# Altium PCB Master - OLD.PcbDoc (part 1 of 3)
Units mm, origin at the board's own origin, x right, y up, seen from the top; angles counter-clockwise.
Board outline 154.8 x 60 mm, 4 copper layers (Top Layer, GND-Layer, PWR-Layer, Bottom Layer), stack 1.57 mm thick; 131 components, 96 nets, 448 pads, 522 vias.
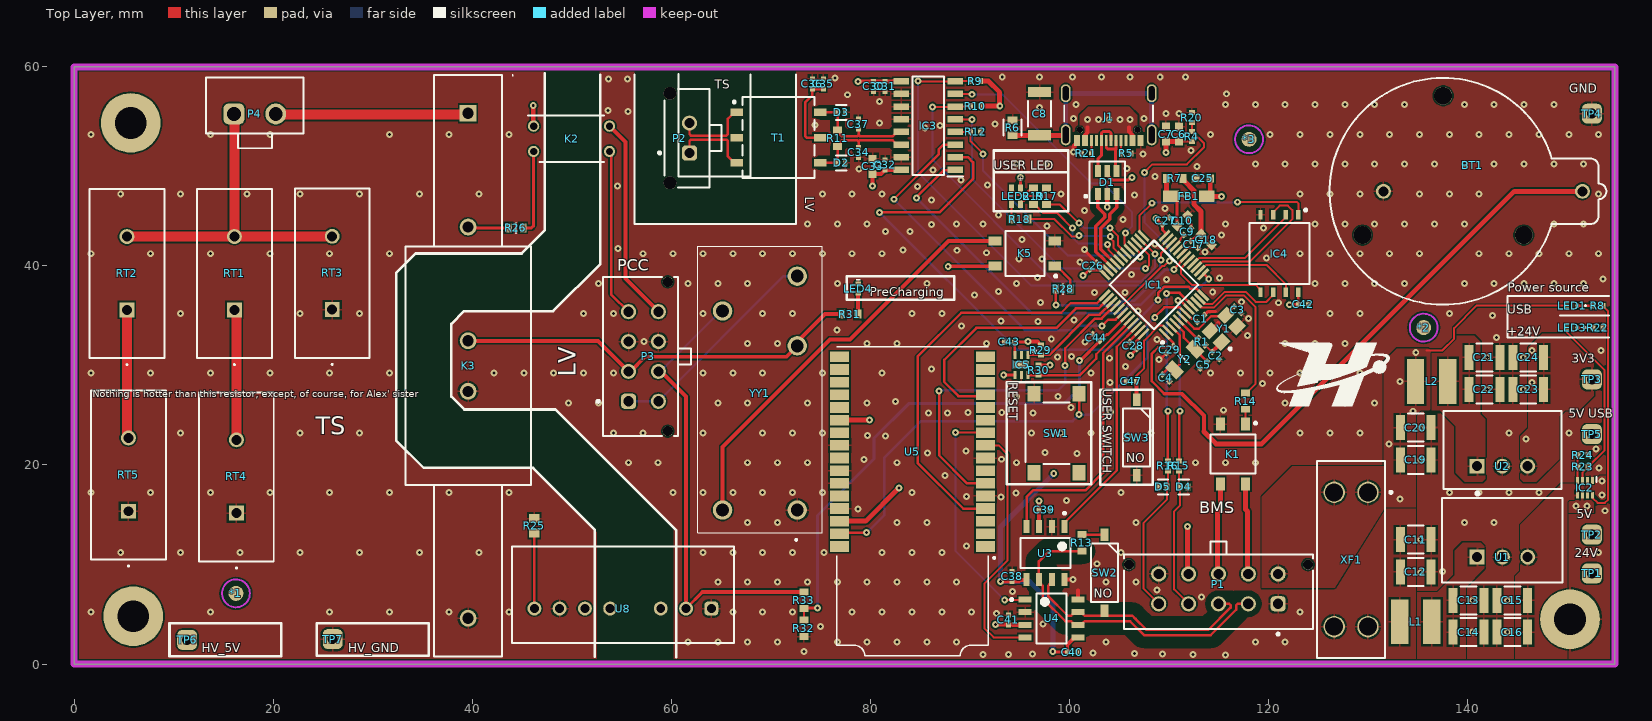
[diagram p0: Top Layer view]
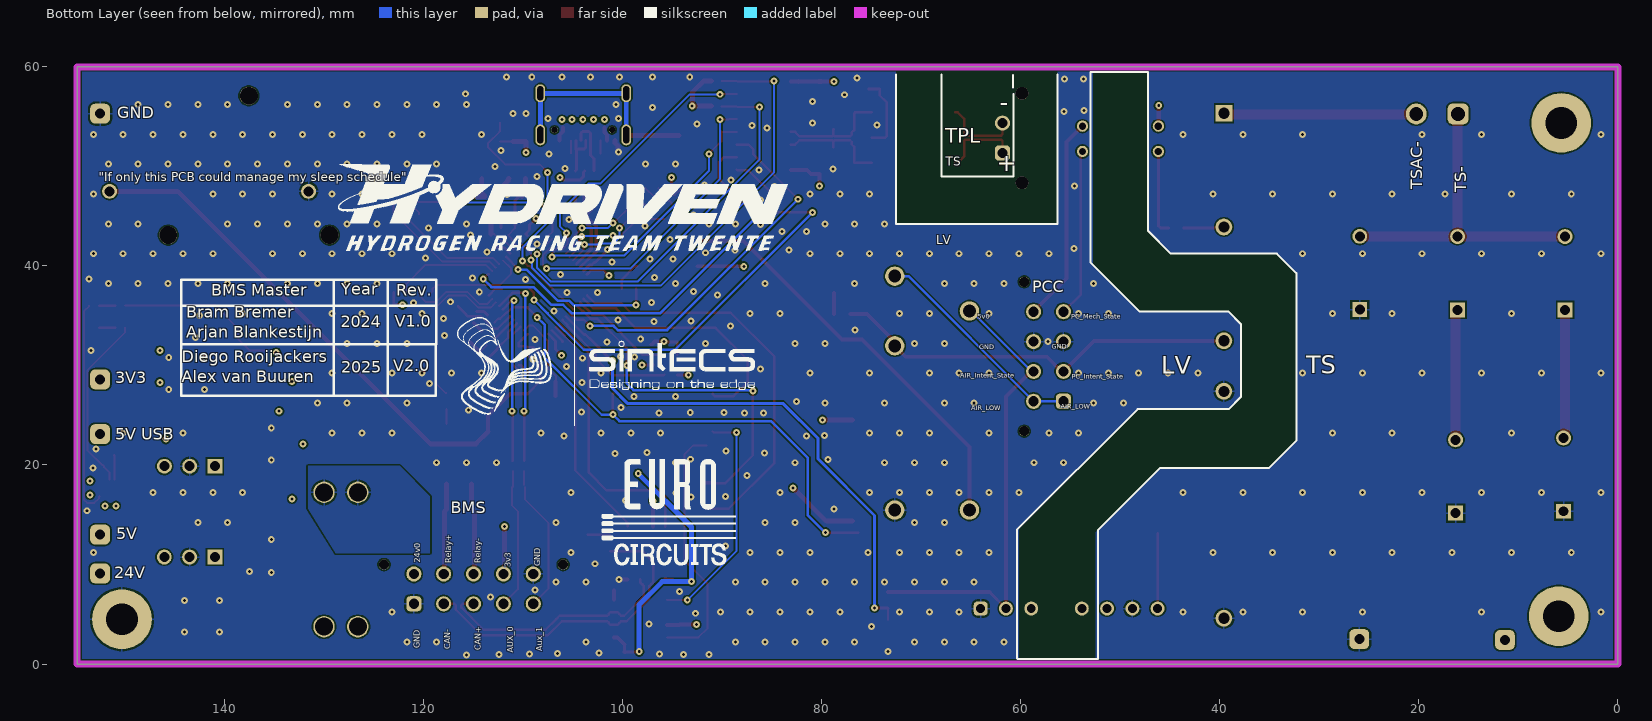
[diagram p1: Bottom Layer view, seen from below]
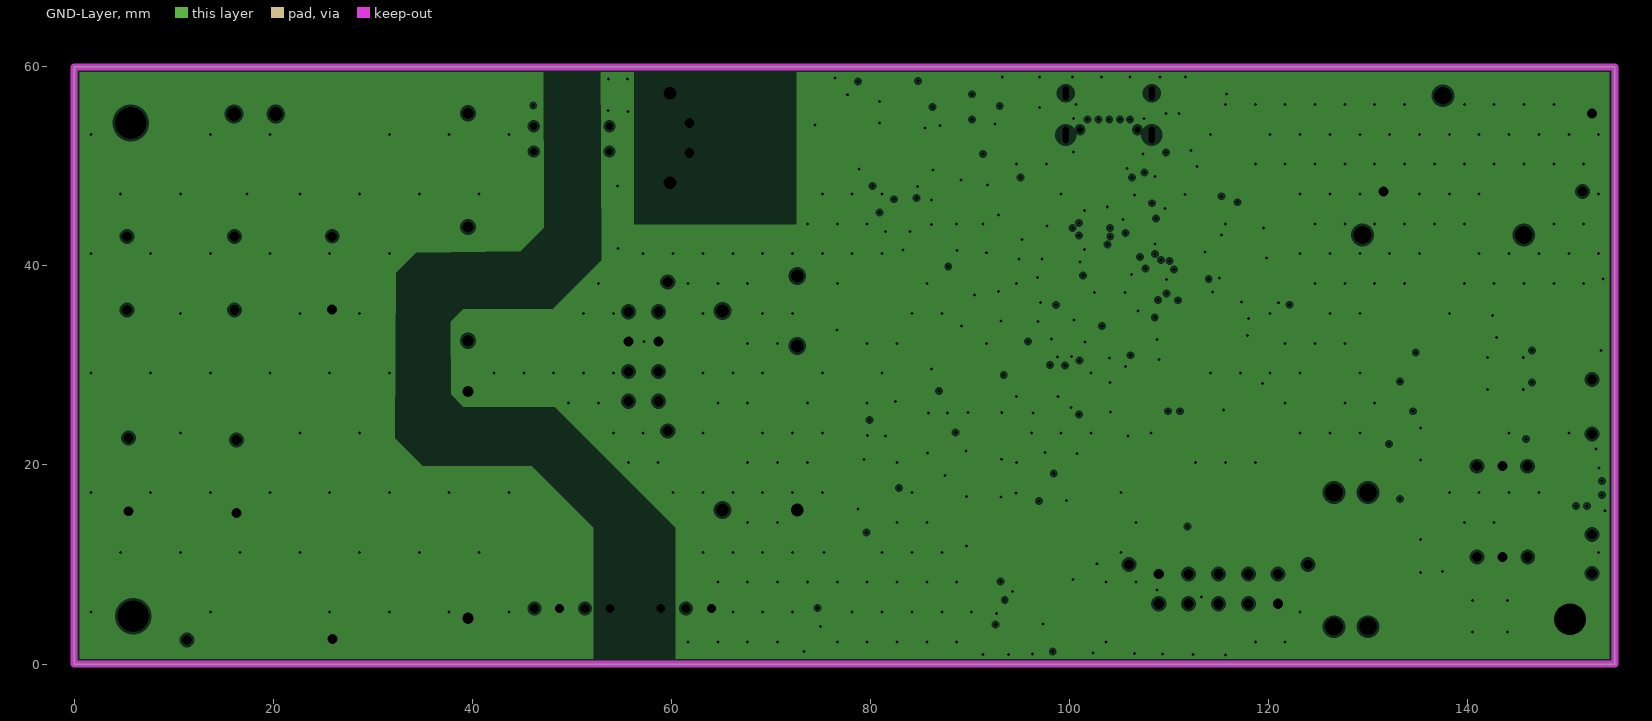
[diagram p2: GND-Layer, clearances drawn from the general rule]
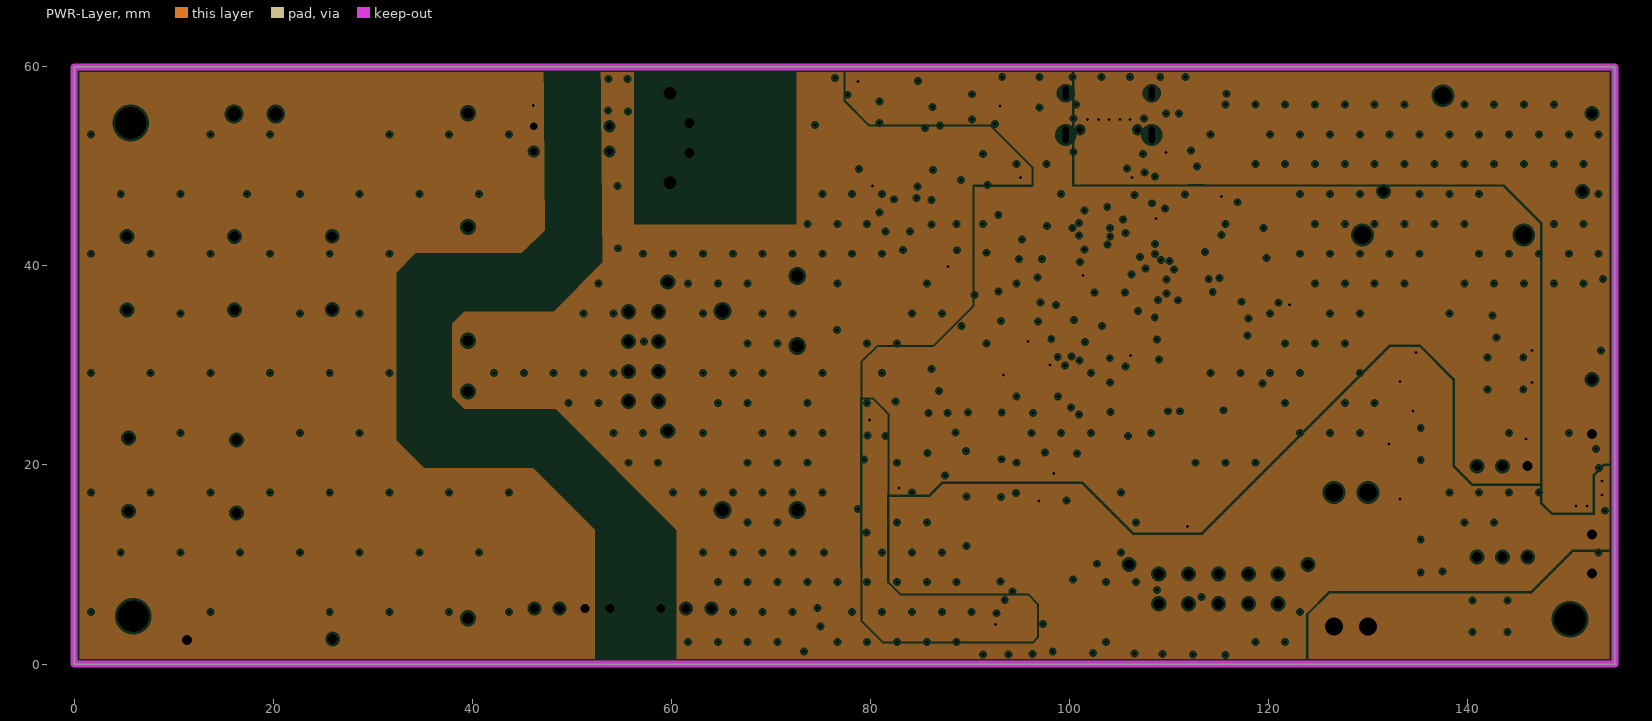
[diagram p3: PWR-Layer, clearances drawn from the general rule]
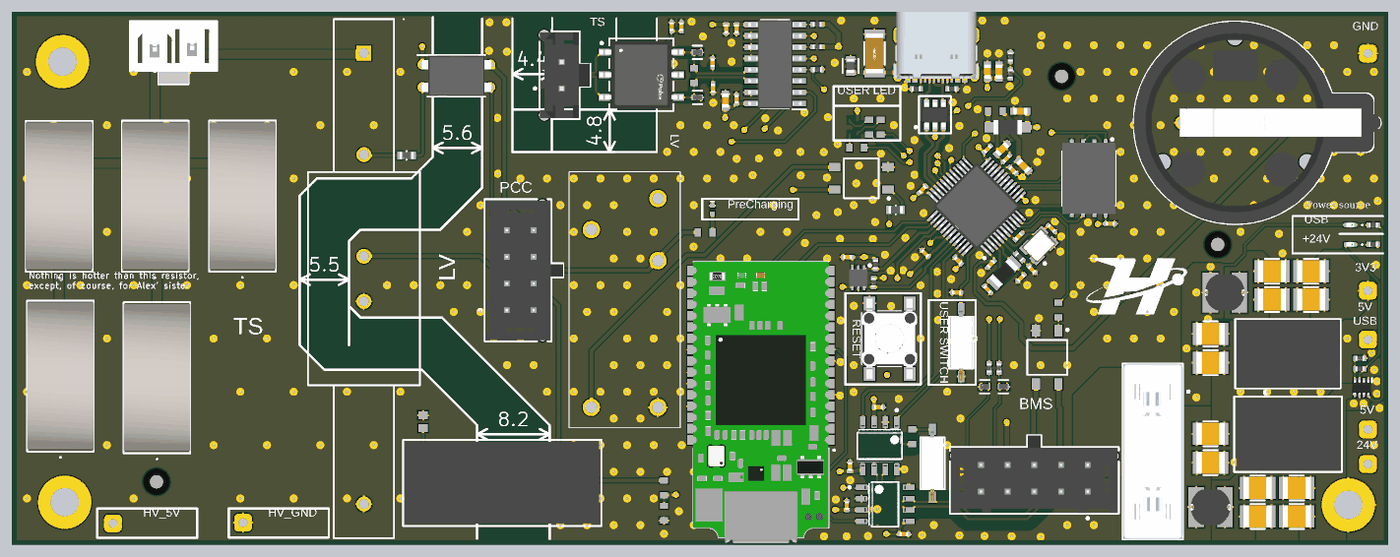
[diagram p5: 3D render of the assembled board from above, using the file's embedded part models]

## Layer stack, top to bottom
Top Solder: solder mask 0.0102, Solder Resist, Dk 3.5
Top Layer: signal copper 0.035
Dielectric1: prepreg 0.36, FR-4, Dk 4.8
GND-Layer: plane copper 0.035, net GND
Dielectric2: core 0.71, FR-4, Dk 4.8
PWR-Layer: plane copper 0.035, net (Multiple Nets)
Dielectric3: prepreg 0.36, FR-4, Dk 4.8
Bottom Layer: signal copper 0.035
Bottom Solder: solder mask 0.0102, Solder Resist, Dk 3.5

## Board outline
0,0 0,60 154.8,60 154.8,0

## Design rules (kind name [scope] priority, off if disabled: settings)
BoardOutlineClearance [All] p1: gap=0.25 ignorepadtopadclearanceinfootprint=FALSE except(0: Arc-SplitContinuation Track-SplitContinuation SMDPad-SplitContinuation THPad-SplitContinuation Via-SplitContinuation Fill-SplitContinuation Poly-SplitContinuation Region-SplitContinuation Text-SplitContinuation)
Clearance "Schematic Clearance Constraint_2" [InDifferentialPairClass('TPL100')] p1: gap=0.15 ignorepadtopadclearanceinfootprint=FALSE except(0.6: Arc-Fill Arc-Poly Arc-Region Track-Fill Track-Poly Track-Region Fill-Fill Fill-Poly Fill-Region Poly-Poly Poly-Region Region-Region)
Clearance "Schematic Clearance Constraint_1" [InDifferentialPairClass('USB90')] p2: gap=0.15 ignorepadtopadclearanceinfootprint=FALSE except(0.6: Arc-Fill Arc-Poly Arc-Region Track-Fill Track-Poly Track-Region Fill-Fill Fill-Poly Fill-Region Poly-Poly Poly-Region Region-Region)
Clearance "Schematic Clearance Constraint" [InDifferentialPairClass('CAN120')] p3: gap=0.15 ignorepadtopadclearanceinfootprint=FALSE except(1.2: Arc-Fill Arc-Poly Arc-Region Track-Fill Track-Poly Track-Region Fill-Fill Fill-Poly Fill-Region Poly-Poly Poly-Region Region-Region)
Clearance [All] p4: gap=0.15 ignorepadtopadclearanceinfootprint=TRUE
ComponentClearance ComponentClearance_netTie0.4 [HasFootprint('NETTIE_0.4mm')] p1: gap=0.15 collisioncheckmode=3 verticalgap=0.15 showdistances=FALSE
ComponentClearance ComponentClearance_netTie0.2 [HasFootprint('NETTIE_0.2mm')] p2: gap=0.15 collisioncheckmode=3 verticalgap=0.15 showdistances=FALSE
ComponentClearance ComponentClearance_0402 [HasFootprint('FP-RT0402-0_35-MFG')] p3: gap=0.15 collisioncheckmode=3 verticalgap=0.15 showdistances=FALSE
ComponentClearance ComponentClearance_0402cap [HasFootprint('WCAP-CSGP_0402_L1W0.5H0.5')] p4: gap=0.15 collisioncheckmode=3 verticalgap=0.15 showdistances=FALSE
ComponentClearance ComponentClearance_default [All] p5: gap=0.25 collisioncheckmode=3 verticalgap=0.25 showdistances=FALSE
DiffPairsRouting USB90 [InDifferentialPairClass('USB90')] p1: maxlimit=0.2 minlimit=0.15 mostfreqgap=0.15 toplayer_minwidth=0.3 toplayer_maxwidth=0.4 toplayer_prefwidth=0.341 bottomlayer_minwidth=0.3 bottomlayer_maxwidth=0.4 bottomlayer_prefwidth=0.341 impedanceprofiledriven=TRUE impedanceprofileid={451BF59F-1CB8-41AE-B4E6-E606ACC86787} impedanceprofilevalue=90.000000 maxuncoupledlength=12.7
DiffPairsRouting TPL100 [InDifferentialPairClass('TPL100')] p2: maxlimit=0.2 minlimit=0.15 mostfreqgap=0.15 toplayer_minwidth=0.2 toplayer_maxwidth=0.3 toplayer_prefwidth=0.247 bottomlayer_minwidth=0.2 bottomlayer_maxwidth=0.3 bottomlayer_prefwidth=0.247 impedanceprofiledriven=TRUE impedanceprofileid={6E5FC908-C1E6-4651-8C0E-0D922B76A3E9} impedanceprofilevalue=100.000000 maxuncoupledlength=12.7
DiffPairsRouting CAN120 [InDifferentialPairClass('CAN120')] p3: maxlimit=0.4 minlimit=0.2 mostfreqgap=0.3 toplayer_minwidth=0.2 toplayer_maxwidth=0.3 toplayer_prefwidth=0.248 bottomlayer_minwidth=0.2 bottomlayer_maxwidth=0.3 bottomlayer_prefwidth=0.248 impedanceprofiledriven=TRUE impedanceprofileid={1664124B-BFFD-4D7B-8FBB-B2DC7230501B} impedanceprofilevalue=120.000000 maxuncoupledlength=12.7
Height [All] p1: minheight=0 maxheight=999 prefheight=1
HoleSize HoleSize-PTH [All] p1: absolutevalues=TRUE maxlimit=8 minlimit=0.25 maxpercent=80.000 minpercent=20.000
HoleToHoleClearance [All] p1: gap=0.35 allowstackedmicrovias=TRUE
MatchedLengths DiffPair_USB90MatchedLengths [InDifferentialPairClass('USB90')] p1: tolerance=25.4 checknetsindiffpair=FALSE checkdiffpairvsdiffpair=TRUE checkxsignals=TRUE checkothers=TRUE
MatchedLengths DiffPair_TPL100MatchedLengths [InDifferentialPairClass('TPL100')] p2: tolerance=25.4 checknetsindiffpair=FALSE checkdiffpairvsdiffpair=TRUE checkxsignals=TRUE checkothers=TRUE
MatchedLengths DiffPair_CAN120MatchedLengths [InDifferentialPairClass('CAN120')] p3: tolerance=25.4 checknetsindiffpair=FALSE checkdiffpairvsdiffpair=TRUE checkxsignals=TRUE checkothers=TRUE
MinimumAnnularRing [All] p1: minimumring=0.125
MinimumSolderMaskSliver [All] p1: minsoldermaskwidth=0.08
PlaneClearance PlaneClearance-IPI [All] p1: clearance=0.25
PlaneConnect [All] p1: pad.planeconnectstyle=Relief pad.reliefexpansion=0.25 pad.reliefentries=4 pad.reliefconductorwidth=0.3 pad.reliefairgap=0.25 via.planeconnectstyle=Direct via.reliefexpansion=0.175 via.reliefentries=4 via.reliefconductorwidth=0.2 via.reliefairgap=0.25
PolygonConnect PolygonConnect-xTW [InNet('+12')] p1: thpad.connectstyle=Relief thpad.reliefconductorwidth=0.5 thpad.reliefentries=4 thpad.polygonreliefangle="90 Angle" thpad.airgapwidth=0.2 smdpad.connectstyle=Relief smdpad.reliefconductorwidth=0.5 smdpad.reliefentries=4 smdpad.polygonreliefangle="90 Angle" smdpad.airgapwidth=0.2 via.connectstyle=Direct via.reliefconductorwidth=0.2 via.reliefentries=4 via.polygonreliefangle="90 Angle" via.airgapwidth=0.2
PolygonConnect PolygonConnect-xTW_1 [All] p2: thpad.connectstyle=Relief thpad.reliefconductorwidth=0.2 thpad.reliefentries=4 thpad.polygonreliefangle="90 Angle" thpad.airgapwidth=0.2 smdpad.connectstyle=Relief smdpad.reliefconductorwidth=0.2 smdpad.reliefentries=4 smdpad.polygonreliefangle="90 Angle" smdpad.airgapwidth=0.2 via.connectstyle=Direct via.reliefconductorwidth=0.2 via.reliefentries=4 via.polygonreliefangle="90 Angle" via.airgapwidth=0.2
RoomDefinition HV [InComponentClass('HV')] p1: confinementstyle=ConfineIn formatcopy=TRUE lockcomponents=FALSE outline 0.25,29.427 0.25,49.027 11.05,49.027 11.05,49.031 12.775,49.031 12.775,59.4 32.848,59.4 32.848,59.527 46.302,59.527 46.302,55.65 55.002,55.65 55.002,12.3 66.75,12.3 66.75,1.65 46.302,1.65 46.302,0.353 32.848,0.353 32.848,9.006 11.25,9.006 11.25,9.194 0.4,9.194 0.4,29.427
RoomDefinition TPL_Trans [InComponentClass('TPL_Trans')] p2: confinementstyle=ConfineIn formatcopy=TRUE lockcomponents=FALSE outline 58.32,47.215 58.32,58.485 73.525,58.485 73.525,59.425 81.812,59.425 81.812,59.58 89.812,59.58 89.812,59.375 91.75,59.375 91.75,54.3 91.775,54.3 91.775,52.7 89.812,52.7 89.812,48.63 81.15,48.63 81.15,48.375 65.505,48.375 65.505,47.215
RoomDefinition CAN_Trans [InComponentClass('CAN_Trans')] p3: confinementstyle=ConfineIn formatcopy=TRUE lockcomponents=FALSE outline 93.225,3.3 93.225,5.55 93.6,5.55 93.6,9.925 94.495,9.925 94.495,15.65 96.325,15.65 96.325,16.15 98.575,16.15 98.575,15.65 100.695,15.65 100.695,14.095 105.37,14.095 105.37,4.255 102.05,4.255 102.05,1.475 101.425,1.475 101.425,0.475 99.175,0.475 99.175,1.475 93.7,1.475 93.7,3.3
RoutingCorners [All] p1: cornerstyle=45-Degree minsetback=2.5 maxsetback=2.5
RoutingVias [All] p1: holewidth=0.3 width=0.7 viastyle="Through Hole" minholewidth=0.3 minwidth=0.7 maxholewidth=0.3 maxwidth=0.7 viatemplateguid#1={BCADC7C4-F6CF-4C0F-8EE4-AB964700880C} viatemplatename#1=v70h30
SMDEntry [All] p1: side=TRUE corner=TRUE anyangle=FALSE
SMDNeckDown SMDNeckDown_1 [All] p1: percent=120.000
SMDToCorner [All] p1: distance=0
SilkToSilkClearance [All] p1: silktosilkclearance=0
SilkToSolderMaskClearance SilkscreenOverComponentPads [IsPad] p1: minsilkscreentomaskgap=0.1 clearancetoexposedcopper=TRUE
SolderMaskExpansion SolderMaskExpansion_Pad [InPadClass('All Pads')] p1: expansion=0.05 istentingtop=FALSE
SolderMaskExpansion SolderMaskExpansion_Via [IsVia] p2: expansion=0.075 istentingtop=FALSE soldermaskfromhole=TRUE
SolderMaskExpansion [All] p3: expansion=0.102 istentingtop=FALSE
SupplyNets "Schematic Supply Nets_12" [InNet('p5v0_USB')] p1: voltage=0.000
SupplyNets "Schematic Supply Nets_11" [InNet('GND')] p2: voltage=0.000
SupplyNets "Schematic Supply Nets_10" [InNet('pVin')] p3: voltage=0.000
SupplyNets "Schematic Supply Nets_9" [InNet('p3v3')] p4: voltage=0.000
SupplyNets "Schematic Supply Nets_8" [InNet('p5v0_ST')] p5: voltage=0.000
SupplyNets "Schematic Supply Nets_7" [InNet('p24v0')] p6: voltage=0.000
SupplyNets "Schematic Supply Nets_6" [InNet('p3v3A')] p7: voltage=0.000
SupplyNets "Schematic Supply Nets_5" [InNet('p5v0')] p8: voltage=0.000
SupplyNets "Schematic Supply Nets_4" [InNet('p5v0_PS')] p9: voltage=0.000
SupplyNets "Schematic Supply Nets_3" [InNet('GND_HV')] p10: voltage=0.000
SupplyNets "Schematic Supply Nets_2" [InNet('p3v3Ref')] p11: voltage=0.000
SupplyNets "Schematic Supply Nets" [InNet('pBat')] p12: voltage=0.000
UnRoutedNet [All] p1: checkbadconnections=TRUE
Width [All] p1: maxlimit=2 minlimit=0.2 preferedwidth=0.4
18 further rules are at their usual default settings.

## Classes and differential pairs
component class TPL_Trans: C30 C31 C32 C33 C34 C35 C36 C37 D2 D3 IC3 P2 R9 R10 R11 R12 T1
component class CAN_Trans: C38 C39 C40 C41 R13 SW2 U3 U4
component class HV: K2 K3 P4 R25 R26 RT1 RT2 RT3 RT4 RT5 U8
component class Designator: C44 K2 K3 K5 LED4 P3 P4 R25 R26 R28 R31 R32 R33 RT1 RT2 RT3 RT4 RT5 TP6 TP7 U8 YY1
component class Top: *1 *2 *3
differential pair class TPL100: RDTX TPL
component class Transceivers: C30 C31 C32 C33 C34 C35 C36 C37 C38 C39 C40 C41 D2 D3 IC3 R9 R10 R11 R12 R13 SW2 T1 U3 U4
component class STM32: C1 C2 C3 C4 C5 C6 C7 C8 D1 IC1 J1 R1 R4 R5 R6 R20 R21 SW1 Y1 Y2
component class Power: BT1 C9 C10 C11 C12 C13 C14 C15 C16 C17 C18 C19 C20 C21 C22 C23 C24 C25 C26 C27 C28 C29 FB1 IC2 L1 L2 LED1 LED3 R7 R8 R22 R23 R24 TP1 TP2 TP3 TP4 TP5 U1 U2 XF1
component class Peripherals: C42 C43 C47 D4 D5 IC4 IC5 K1 LED2 R14 R15 R16 R17 R18 R19 R29 R30 SW3
component class Connectors: P1 P2
differential pair class CAN120: CAN
component class STLink: U5
differential pair class USB90: USB
differential pair RDTX: +RDTX_P -RDTX_N
differential pair TPL: +TPL_P -TPL_N
differential pair CAN: +CAN_HI -CAN_LO
differential pair USB: +USB_P -USB_N

## Components (designator, comment, footprint, x,y, rotation, side; value= is the part's Value field where it differs from the comment)
*1 "GTT standard Fiducial 1.5" "Fiducial 1.5mm" 16.25,7.1 r0 top
*2 "GTT standard Fiducial 1.5" "Fiducial 1.5mm" 135.6,33.8 r0 top
*3 "GTT standard Fiducial 1.5" "Fiducial 1.5mm" 118.05,52.725 r0 top
BT1 "79528211" 79528211 137.55,47.5 r180 top locked
C1 "CAP 0402 100nF X7R" WCAP-CSGP_0402_L1W0.5H0.5 113.2,34.7 r225 top value=100nF
C2 "CAP 0402 16pF X7R" WCAP-CSGP_0402_L1W0.5H0.5 114.7,31 r135 top value=16pF
C3 "CAP 0402 16pF X7R" WCAP-CSGP_0402_L1W0.5H0.5 116.9,35.6 r135 top value=16pF
C4 "CAP 0402 5.1pF X7R" WCAP-CSGP_0402_L1W0.5H0.5 109.7,28.75 r135 top value=5.1pF
C5 "CAP 0402 5.1pF X7R" WCAP-CSGP_0402_L1W0.5H0.5 113.475,30.05 r45 top value=5.1pF
C6 "CAP 0603 2.2uF X7R" WCAP-CSGP_0603_L1.6W0.8H0.8_Reflow 111,53.25 r270 top value=2.2uF
C7 "CAP 0603 2.2uF X7R" WCAP-CSGP_0603_L1.6W0.8H0.8_Reflow 109.7,53.25 r270 top value=2.2uF
C8 "CC1808KKX7REBB102" FP-CC1808-0_4-2_2-MFG 97,55.3 r270 top
C9 "CAP 0402 100nF X7R" WCAP-CSGP_0402_L1W0.5H0.5 111.854,43.454 r225 top value=100nF
C10 "CAP 0603 1uF X7R" WCAP-CSGP_0603_L1.6W0.8H0.8_Reflow 111.354,44.554 r45 top value=1uF
C11 "885012209048" WCAP-CSGP_1210_L3.2W2.5H2.5 134.8,12.5 r180 top value=4.7µF
C12 "885012209048" WCAP-CSGP_1210_L3.2W2.5H2.5 134.8,9.25 r180 top value=4.7µF
C13 "885012209048" WCAP-CSGP_1210_L3.2W2.5H2.5 140.1,6.4 r180 top value=4.7µF
C14 "885012209048" WCAP-CSGP_1210_L3.2W2.5H2.5 140.1,3.2 r180 top value=4.7µF
C15 "885012109014" WCAP-CSGP_1210_L3.2W2.5H2.5 144.5,6.4 r0 top
C16 "885012109014" WCAP-CSGP_1210_L3.2W2.5H2.5 144.5,3.2 r0 top
C17 "CAP 0402 100nF X7R" WCAP-CSGP_0402_L1W0.5H0.5 112.554,42.154 r135 top value=100nF
C18 "CAP 0603 1uF X7R" WCAP-CSGP_0603_L1.6W0.8H0.8_Reflow 113.754,42.654 r315 top value=1uF
C19 "885012209048" WCAP-CSGP_1210_L3.2W2.5H2.5 134.8,20.5 r180 top value=4.7µF
C20 "885012209048" WCAP-CSGP_1210_L3.2W2.5H2.5 134.8,23.75 r180 top value=4.7µF
C21 "885012209048" WCAP-CSGP_1210_L3.2W2.5H2.5 141.7,30.8 r180 top value=4.7µF
C22 "885012209048" WCAP-CSGP_1210_L3.2W2.5H2.5 141.7,27.6 r180 top value=4.7µF
C23 "885012109014" WCAP-CSGP_1210_L3.2W2.5H2.5 146.1,27.6 r0 top
C24 "885012109014" WCAP-CSGP_1210_L3.2W2.5H2.5 146.1,30.8 r0 top
C25 "CAP 0603 4.7uF X7R" WCAP-CSGP_0603_L1.6W0.8H0.8_Reflow 113.4,48.8 r180 top value=4.7uF
C26 "CAP 0402 100nF X7R" WCAP-CSGP_0402_L1W0.5H0.5 102.4,40 r225 top value=100nF
C27 "CAP 0402 100nF X7R" WCAP-CSGP_0402_L1W0.5H0.5 109.7,44.525 r225 top value=100nF
C28 "CAP 0402 100nF X7R" WCAP-CSGP_0402_L1W0.5H0.5 106.4,32 r315 top value=100nF
C29 "CAP 0402 100nF X7R" WCAP-CSGP_0402_L1W0.5H0.5 110.1,31.6 r45 top value=100nF
C30 "CAP 0402 100nF X7R" WCAP-CSGP_0402_L1W0.5H0.5 80.325,58.05 r90 top value=100nF
C31 "CAP 0402 1nF X7R" WCAP-CSGP_0402_L1W0.5H0.5 81.475,58.05 r90 top value=1nF
C32 "CAP 0402 100nF X7R" WCAP-CSGP_0402_L1W0.5H0.5 81.475,50.15 r270 top value=100nF
C33 "CAP 0603 2.2uF X7R" WCAP-CSGP_0603_L1.6W0.8H0.8_Reflow 80.225,50 r270 top value=2.2uF
C34 "CAP 0402 68pF X7R" WCAP-CSGP_0402_L1W0.5H0.5 78.825,51.4 r270 top value=68pF
C35 "DNP" WCAP-CSGP_0402_L1W0.5H0.5 75.275,58.3 r270 top value=100pF
C36 "CAP 0402 100pF X7R" WCAP-CSGP_0402_L1W0.5H0.5 74.175,58.3 r270 top value=100pF
C37 "CAP 0402 68pF X7R" WCAP-CSGP_0402_L1W0.5H0.5 78.8,54.25 r270 top value=68pF
C38 "CAP 0402 100nF X7R" WCAP-CSGP_0402_L1W0.5H0.5 94.25,8.8 r270 top value=100nF
C39 "CAP 0402 100nF X7R" WCAP-CSGP_0402_L1W0.5H0.5 97.45,15.5 r180 top value=100nF
C40 "CAP 0402 100nF X7R" WCAP-CSGP_0402_L1W0.5H0.5 100.3,1.2 r180 top value=100nF
C41 "CAP 0402 100nF X7R" WCAP-CSGP_0402_L1W0.5H0.5 93.875,4.425 r270 top value=100nF
C42 "CAP 0402 100nF X7R" WCAP-CSGP_0402_L1W0.5H0.5 123.504,36.144 r180 top value=100nF
C43 "CAP 0402 100nF X7R" WCAP-CSGP_0402_L1W0.5H0.5 93.975,32.375 r0 top value=100nF
C44 "CAP 0402 5.1pF X7R" WCAP-CSGP_0402_L1W0.5H0.5 102.7,32.8 r315 top value=5.1pF
C47 "CAP 0402 100nF X7R" WCAP-CSGP_0402_L1W0.5H0.5 106.225,28.4 r0 top value=100nF
D1 "USBLC6-2SC6" ST_SOT23-6L 103.8,48.4 r90 top
D2 "PESD5V0F1BLD,315" FP-SOD882D-MFG 77.075,50.35 r0 top
D3 "PESD5V0F1BLD,315" FP-SOD882D-MFG 77.075,55.425 r180 top
D4 "PESD5V0F1BLD,315" FP-SOD882D-MFG 111.5,17.8 r180 top
D5 "PESD5V0F1BLD,315" FP-SOD882D-MFG 109.4,17.8 r0 top
FB1 "742792118" WE-CBF_1206_L3.2W1.6H1.1_HC 112,47 r180 top
IC1 "STM32G491CET6" QFP50P900X900X160-48N 108.5,38.1 r135 top
IC2 "TPS2116DRLR" SOTFL50P160X60-8N 151.8,17.7 r270 top
IC3 "MC33664ATL1EG" SOIC127P600X175-16N 85.812,54.105 r180 top
IC4 "AS5F38G04SND-08LIN" SON127P800X600X80-8N 121.104,41.244 r270 top
IC5 "2521020222501" SON65P200X200X55-7N-D 95.175,30.05 r270 top
J1 "629722000214" 629722000214 103.95,56.205 r180 top
K1 "AQY212S" PNSC-SOP4_V 116.43,21.1 r270 top
K2 "CPC1333G" DIP762W53P254L457H335Q4N 49.975,52.775 r0 top
K3 "67-1-C-24_5D" 671C245D 39.575,55.34 r270 top
K5 "AQY212S" PNSC-SOP4_V 95.525,41.25 r180 top
L1 "744773047" WE-PD2_4532 134.8,4.25 r0 top
L2 "744773047" WE-PD2_4532 136.4,28.4 r0 top
LED1 "150040GS73220" 150040GS73220 150.5,36 r180 top
LED2 "150066M153000" WL-SFCD_0606 -1175.35,1317 r90 top
LED3 "150040GS73220" 150040GS73220 150.5,33.8 r180 top
LED4 "QBLP595-R" QTB-QBLP595_V 78.775,37.725 r270 top
P1 "66201021122" 66201021122 114.975,7.25 r0 top
P2 "66200211122" 66200211122 61.57,52.85 r270 top
P3 "66200821122" 66200821122 56.9,30.9 r270 top
P4 "64900211122" 64900211122 18.15,56.125 r180 top
R1 "RES 0402 120R 1%" FP0402 113.3,32.4 r315 top value=120R
R4 "RES 0402 33kR 1%" FP0402 112.3,53 r90 top value=33kR
R5 "RES 0402 5.1kR 1%" FP0402 105.7,51.3 r180 top value=5.1kR
R6 "CRCW06031M00FKEA" FP-CRCW0603-e3-MFG 94.3,53.9 r270 top
R7 "RES 0603 47R 1%" RES_SM0603_YAGEORC_N 110.6,48.8 r180 top value=47R
R8 "RES 0402 1kR 1%" FP0402 153.1,36 r180 top value=1kR
R9 "RES 0402 5.1kR 1%" FP0402 90.55,58.575 r0 top value=5.1kR
R10 "RES 0402 5.1kR 1%" FP0402 90.55,56.05 r0 top value=5.1kR
R11 "RES 0603 150R 1%" RES_SM0603_YAGEORC_N 76.7,52.825 r270 top value=150R
R12 "RES 0402 5.1kR 1%" FP0402 90.575,53.5 r180 top value=5.1kR
R13 "RES 0603 120R 1%" RES_SM0603_YAGEORC_N 101.25,12.175 r90 top value=120R
R14 "RES 0603 330R 1%" RES_SM0603_YAGEORC_N 117.7,26.427 r270 top value=330R
R15 "RES 0402 1kR 1%" FP0402 111,19.9 r270 top value=1kR
R16 "RES 0402 1kR 1%" FP0402 109.9,19.9 r270 top value=1kR
R17 "RES 0603 330R 1%" RES_SM0603_YAGEORC_N 97.7,47 r90 top value=330R
R18 "RES 0603 330R 1%" RES_SM0603_YAGEORC_N 95,44.7 r180 top value=330R
R19 "RES 0603 330R 1%" RES_SM0603_YAGEORC_N 96.4,47 r90 top value=330R
R20 "RES 0402 82kR 1%" FP0402 112.3,54.9 r90 top value=82kR
R21 "RES 0402 5.1kR 1%" FP0402 101.7,51.3 r0 top value=5.1kR
R22 "RES 0402 1kR 1%" FP0402 153.1,33.8 r180 top value=1kR
R23 "RES 0402 100kR 1%" FP0402 151.6,19.8 r0 top value=100kR
R24 "RES 0402 27kR 1%" FP0402 151.6,21 r180 top value=27kR
R25 "26.7k" RESC1608X55X30ML15T15 46.225,13.875 r90 top
R26 "1kR" FP-ERA3A-MFG 44.375,43.825 r180 top
R28 "8.2kR" FP-ERA3A-MFG 99.375,37.7 r0 top value=330R
R29 "RES 0402 2.7kR 1%" FP0402 97.125,31.55 r90 top value=2.7kR
R30 "RES 0402 2.7kR 1%" FP0402 96.9,29.525 r90 top value=2.7kR
R31 "RES 0603 4.3kR 1%" RES_SM0603_YAGEORC_N 77.95,35.15 r180 top value=4.3kR
R32 "2.7kR" RES_SM0603_YAGEORC_N 73.325,3.573 r90 top value=82kR
R33 "20kR" RES_SM0603_YAGEORC_N 73.325,6.425 r90 top value=670kR
RT1 "PTCEL67R501TBE" PTCEL67R501TBE-Footprint-1 16.1,39.525 r90 top value=500
RT2 "PTCEL67R501TBE" PTCEL67R501TBE-Footprint-1 5.3,39.521 r90 top value=500
RT3 "PTCEL67R501TBE" PTCEL67R501TBE-Footprint-1 25.925,39.55 r90 top value=500
RT4 "PTCEL67R501TBE" PTCEL67R501TBE-Footprint-1 16.3,19.1 r90 top value=500
RT5 "PTCEL67R501TBE" PTCEL67R501TBE-Footprint-1 5.45,19.288 r90 top value=500
SW1 "430182050816" WS-TASV_L6W6H5_4301x20508x6 98.7,23.2 r270 top
SW2 "416131160801" 416131160801 103.525,9.175 r180 top
SW3 "416131160801" 416131160801 106.75,22.76 r180 top
T1 "HM2103NL" FP-HM2103NL-MFG 70.775,52.9 r270 top
TP1 "GTT_ProbeerPunt" GTT_ProbeerPuntFP 152.5,9.1 r0 top
TP2 "GTT_ProbeerPunt" GTT_ProbeerPuntFP 152.5,13 r0 top
TP3 "GTT_ProbeerPunt" GTT_ProbeerPuntFP 152.5,28.6 r0 top
TP4 "GTT_ProbeerPunt" GTT_ProbeerPuntFP 152.5,55.3 r0 top
TP5 "GTT_ProbeerPunt" GTT_ProbeerPuntFP 152.5,23.1 r0 top
TP6 "GTT_ProbeerPunt" GTT_ProbeerPuntFP 11.35,2.425 r0 top
TP7 "GTT_ProbeerPunt" GTT_ProbeerPuntFP 25.975,2.5 r0 top
U1 "173010535" 173010x35 143.51,12.45 r0 top
U2 "173950336" 173950x36 143.5,21.5 r0 top
U3 "TJA1044GT/3Z" FP-SOT96-1-MFG 97.595,11.15 r270 top
U4 "TJA1044GT/3Z" FP-SOT96-1-MFG 98.2,4.575 r0 top
U5 "STLINK-V3MODS" MODULE_STLINK-V3MODS 84.23,1.904 r180 top
U8 "17791063215" WPME-VISM_SIP-8_L21.8W9.2H11.1 55.125,6.975 r180 top
XF1 "3557-2" KSTN-3557-2 128.3,10.5 r270 top
Y1 "X1E0000210193" FP-TSX-3225-MFG 115.5,33.7 r45 top
Y2 "ECS-.327-6-34S-TR" RESC3215X100N 111.575,30.6 r45 top
YY1 "G2RL-14-DC5" G2RL14DC12 72.65,15.475 r90 top

## Footprints (in the part's own frame and the unit in brackets; to place one, negate y for a bottom-side part, rotate by r counter-clockwise, add the part's x,y. Pads: shape width x height; smd on the part's side, far side on the other; paste and mask are expansions set on the pad)
671C245D [mm]
  rect 1.68x1.68 hole 1.12: 1(0,0)
  round 1.68 hole 1.12: 2(11.43,0) 3(22.86,0) 5(27.94,0) 7(50.74,0)
  silkscreen extent -3.86,-6.3 54.57,6.3
150040GS73220 [mm]
  rect 0.4x0.46 smd: 1(-0.5,0) 2(0.5,0)
  silkscreen extent -1.4,-0.05 -1.3,0.05, body extent -0.5,-0.25 0.5,0.25, height 0.35
173010x35 [mm] "Fixed Step Down Regulator Module, SIP-3, body 11.6x8mm"
  rect 1.5x1.5 hole 1: 1(-2.54,-1.7)
  round 1.5 hole 1: 2(0,-1.7) 3(2.54,-1.7)
  silkscreen extent -6.05,-4.25 6.05,4.25, body extent -5.8,-4 5.8,4, height 10.45
173950x36 [mm] "Fixed Step Down Regulator Module, SIP-3, body 11.6x7.55mm"
  rect 1.5x1.5 hole 1: 1(-2.54,-1.625)
  round 1.5 hole 1: 2(0,-1.625) 3(2.54,-1.625)
  silkscreen extent -5.92,-4.52 5.92,3.9, body extent -5.8,-3.77 5.8,3.77, height 10.2
79528211 [mm] "Battery Holder"
  round 1.5 hole 1: 1(-14,0) 2(6,0)
  round 1.8 hole 1.8 unplated: MH1(-8.1,4.4) MH2(8.1,4.4) MH3(0,-9.6)
  silkscreen extent -16.4,-11.4 11.4,11.4, body extent -16.4,-11.4 11.4,11.4, height 8.5
64900211122 [mm] "4.20mm Male Single Row Vertical Header, 2p"
  rrect50% 2.1x2.1 hole 1.4: 1(2.1,0.85)
  round 2.1 hole 1.4: 2(-2.1,0.85)
  silkscreen extent -4.9,-2.8 4.9,4.3, body extent -4.8,-2.7 4.8,4.2, height 12.83
66200211122 [mm] "3.00mm Male Single Row Vertical Header, 2p"
  rrect50% 1.52x1.52 hole 1.02: 1(1.5,0.255)
  round 1.52 hole 1.02: 2(-1.5,0.255)
  round 1.27 hole 1.27 unplated: MH1(-4.5,-1.705) MH2(4.5,-1.705)
  silkscreen extent -4.95,-2.87 4.95,3.46, body extent -4.83,-2.18 4.83,3.38, height 9.93
66200821122 [mm] "Dual row Vertical header 08p"
  rrect50% 1.52x1.52 hole 1.02: 1(4.5,-1.2)
  round 1.52 hole 1.02: 2(1.5,-1.2) 3(-1.5,-1.2) 4(-4.5,-1.2) 5(4.5,1.8) 6(1.5,1.8) 7(-1.5,1.8) 8(-4.5,1.8)
  round 1.02 hole 1.02 unplated: MH1(-7.5,2.74) MH2(7.5,2.74)
  silkscreen extent -8,-4.37 8,5.08, body extent -7.85,-3.68 7.85,5.08, height 9.93
66201021122 [mm] "Dual row Vertical header 10p"
  rrect50% 1.52x1.52 hole 1.02: 1(6,-1.2)
  round 1.52 hole 1.02: 2(3,-1.2) 3(0,-1.2) 4(-3,-1.2) 5(-6,-1.2) 6(6,1.8) 7(3,1.8) 8(0,1.8) 9(-3,1.8) 10(-6,1.8)
  round 1.02 hole 1.02 unplated: MH1(-9,2.74) MH2(9,2.74)
  silkscreen extent -9.5,-4.37 9.5,5.08, body extent -9.35,-3.68 9.35,5.08, height 9.93
416131160801 [mm] "SMD Dip Switch, Small Compact, Raised Actuator, 1pin"
  rect 0.76x1.27 smd: 1(0,-3.81) 2(0,3.81)
  silkscreen extent -1.37,-2.93 1.37,2.93, body extent -1.22,-4.32 1.22,4.32, height 2.65
629722000214 [mm] "USB TYPE C VERTICAL PLUG"
  rect 0.6x1.14 smd: A1/B12(-3.2,3.605) A4/B9(-2.4,3.605) A9/B4(2.4,3.605) A12/B1(3.2,3.605)
  rect 0.3x1.14 smd: A5(-1.25,3.605) A6(-0.25,3.605) A7(0.25,3.605) A8(1.25,3.605) B5(1.75,3.605) B6(0.75,3.605) B7(-0.75,3.605) B8(-1.75,3.605)
  round 0.65 hole 0.65 unplated mask+0: MH1(-2.89,2.535) MH2(2.89,2.535)
  oval 1x2.1 hole 0.6 slot 1.7 at 90 deg: Shell(-4.32,3.035) Shell(4.32,3.035)
  oval 1x1.8 hole 0.6 slot 1.4 at 90 deg: Shell(-4.32,-1.145) Shell(4.32,-1.145)
  silkscreen extent -4.47,0.07 4.47,1.7, body extent -4.79,-3.76 4.79,3.95, height 3.33
DIP762W53P254L457H335Q4N [mm]
  round 1.133 hole 0.733: 1(-3.81,1.27) 2(-3.81,-1.27) 3(3.81,-1.27) 4(3.81,1.27)
  silkscreen extent -4.38,-2.35 3.24,2.35, body extent -3.94,-2.29 3.94,2.29, height 3.35
"Fiducial 1.5mm" [mm]
  round 1.5 smd mask+0.75: ""(0,0)
  Top Layer keep-out circle w0.2: c0,0 r1.4
FP0402 [mm]
  rect 0.5x0.6 smd: 1(-0.5,0) 2(0.5,0)
  body extent -0.85,-0.4 0.85,0.4, height 0.25
FP-CC1808-0_4-2_2-MFG [mm]
  rect 1.05x2.3 smd: 1(-2.175,0) 2(2.175,0)
  silkscreen extent -1.27,-1.15 1.27,1.15, body extent -3.03,-1.58 3.03,1.58, height 0.25
FP-CRCW0603-e3-MFG [mm]
  rect 0.75x1 smd: 1(-0.75,0) 2(0.75,0)
  silkscreen extent -0.8,-0.9 0.8,0.9, body extent -1.22,-0.6 1.22,0.6, height 0.25
FP-ERA3A-MFG [mm]
  rect 0.65x0.9 smd paste+0 mask+0: 1(-0.725,0) 2(0.725,0)
  silkscreen extent 0,-0.5 0,0.5, body extent -1.15,-0.6 1.15,0.6, height 0.25
FP-HM2103NL-MFG [mm]
  rect 0.76x1.27 smd: 1(-2.54,-4.19) 2(0,-4.19) 3(2.54,-4.19) 4(2.54,4.19) 5(0,4.19) 6(-2.54,4.19)
  silkscreen extent -4.07,-4.58 4.07,3.62, body extent -4.17,-4.92 4.17,4.92, height 0.25
FP-SOD882D-MFG [mm]
  rect 0.5x0.7 smd: 1(-0.4,0) 2(0.4,0)
  silkscreen extent -0.53,-0.75 0.53,0.75, body extent -0.75,-0.45 0.75,0.45, height 0.25
FP-SOT96-1-MFG [mm]
  rect 1.3x0.6 smd: 1(-2.65,1.905) 2(-2.65,0.635) 3(-2.65,-0.635) 4(-2.65,-1.905) 5(2.65,-1.905) 6(2.65,-0.635) 7(2.65,0.635) 8(2.65,1.905)
  silkscreen extent -4.12,-2.5 1.5,2.5, body extent -3.5,-2.75 3.5,2.75, height 0.25
FP-TSX-3225-MFG [mm]
  rect 1.4x1.15 smd: 1(-1.1,-0.8) 2(1.1,-0.8) 3(1.1,0.8) 4(-1.1,0.8)
  silkscreen extent -1.1,-2.02 -0.85,-1.78, body extent -1.9,-1.47 1.9,1.47, height 0.25
G2RL14DC12 [mm]
  round 1.95 hole 1.3: 1(0,0) 2(16.5,0) 3(23.5,0) 4(20,7.5) 5(0,7.5)
  silkscreen extent -3.1,-2.5 26.5,10, body extent 8.6,1.52 13.68,6.6, height 0.25
GTT_ProbeerPuntFP [mm]
  rrect50% 2x2 hole 1: 1(0,0)
KSTN-3557-2 [mm] "Fuse Holder, PCB Mount, Thru-Hole, Body 19.8x6.8mm, Height 7.4mm"
  round 2.15 hole 1.8: 1(-6.75,1.7) 2(-6.75,-1.7) 3(6.75,1.7) 4(6.75,-1.7)
  silkscreen extent -9.9,-3.4 9.9,4.13, body extent -9.91,-3.37 9.91,3.37, height 7.74
MODULE_STLINK-V3MODS [mil]
  rect 74.8x42.13 smd: 1(-288.19,-390) 2(-288.19,-440) 3(-288.19,-490) 4(-288.19,-540) 5(-288.19,-590) 6(-288.19,-640) 7(-288.19,-690) 8(-288.19,-740) 9(-288.19,-790) 10(-288.19,-840) 11(-288.19,-890) 12(-288.19,-940) 13(-288.19,-990) 14(-288.19,-1040) 15(-288.19,-1090) 16(-288.19,-1140) 17(288.19,-1140) 18(288.19,-1090) 19(288.19,-1040) 20(288.19,-990) 21(288.19,-940) 22(288.19,-890) 23(288.19,-840) 24(288.19,-790) 25(288.19,-740) 26(288.19,-690) 27(288.19,-640) 28(288.19,-590) 29(288.19,-540) 30(288.19,-490) 31(288.19,-440) 32(288.19,-390)
  silkscreen extent -327,-1180 300,43, body extent -300,-1180 300,67, height 176
PNSC-SOP4_V [mm] "SOP, 4-Leads, Body 4.4x4.3mm, Pitch 2.54mm"
  rect 1.3x0.9 smd: 1(-3,1.27) 2(-3,-1.27) 3(3,-1.27) 4(3,1.27)
  silkscreen extent -3.22,-2.25 1.95,2.4, body extent -2.3,-2.25 2.3,2.25, height 2.2
PTCEL67R501TBE-Footprint-1 [mm]
  rect 1.5x1.5 hole 1: 1(-3.937,0)
  round 1.5 hole 1: 2(3.429,0)
  silkscreen extent -9.49,-3.75 8.21,3.75, body extent -8.5,-3.75 8,3.75, height 20.74
QFP50P900X900X160-48N [mm]
  rect 1.475x0.3 smd: 1(-4.238,2.75) 2(-4.238,2.25) 3(-4.238,1.75) 4(-4.238,1.25) 5(-4.238,0.75) 6(-4.238,0.25) 7(-4.238,-0.25) 8(-4.238,-0.75) 9(-4.238,-1.25) 10(-4.238,-1.75) 11(-4.238,-2.25) 12(-4.238,-2.75) 25(4.238,-2.75) 26(4.238,-2.25) 27(4.238,-1.75) 28(4.238,-1.25) 29(4.238,-0.75) 30(4.238,-0.25) 31(4.238,0.25) 32(4.238,0.75) 33(4.238,1.25) 34(4.238,1.75) 35(4.238,2.25) 36(4.238,2.75)
  rect 0.3x1.475 smd: 13(-2.75,-4.238) 14(-2.25,-4.238) 15(-1.75,-4.238) 16(-1.25,-4.238) 17(-0.75,-4.238) 18(-0.25,-4.238) 19(0.25,-4.238) 20(0.75,-4.238) 21(1.25,-4.238) 22(1.75,-4.238) 23(2.25,-4.238) 24(2.75,-4.238) 37(2.75,4.238) 38(2.25,4.238) 39(1.75,4.238) 40(1.25,4.238) 41(0.75,4.238) 42(0.25,4.238) 43(-0.25,4.238) 44(-0.75,4.238) 45(-1.25,4.238) 46(-1.75,4.238) 47(-2.25,4.238) 48(-2.75,4.238)
  silkscreen extent -4.85,-3.15 3.15,3.62, body extent -4.5,-4.5 4.5,4.5, height 1.6
QTB-QBLP595_V [mm] "SMD, 2-Leads, Body 1x0.5mm"
  rrect25% 0.5x0.55 smd: 1(-0.455,0) 2(0.455,0)
  silkscreen extent -0.9,-0.2 -0.9,0.2, body extent -0.5,-0.25 0.5,0.25, height 0.5
RES_SM0603_YAGEORC_N [mm] "Resistor, Yageo RC_L, SM0603, IPC Medium Density"
  rect 0.7x0.9 smd: 1(-0.827,0) 2(0.827,0)
  body extent -0.85,-0.45 0.85,0.45, height 0.55
RESC1608X55X30ML15T15 [mm] "Chip Resistor, 2-Leads, Body 1.60x0.80mm, IPC Low Density"
  rect 0.9x1.05 smd: 1(-0.725,0) 2(0.725,0)
  body extent -0.87,-0.48 0.87,0.48, height 0.55
RESC3215X100N [mm]
  rect 1.1x1.65 smd: 1(-1.45,0) 2(1.45,0)
  silkscreen extent 0,-0.65 0,0.65, body extent -1.6,-0.75 1.6,0.75, height 1
SOIC127P600X175-16N [mm]
  rect 1.525x0.65 smd: 1(-2.712,4.445) 2(-2.712,3.175) 3(-2.712,1.905) 4(-2.712,0.635) 5(-2.712,-0.635) 6(-2.712,-1.905) 7(-2.712,-3.175) 8(-2.712,-4.445) 9(2.712,-4.445) 10(2.712,-3.175) 11(2.712,-1.905) 12(2.712,-0.635) 13(2.712,0.635) 14(2.712,1.905) 15(2.712,3.175) 16(2.712,4.445)
  silkscreen extent -3.47,-4.95 1.6,5.12, body extent -3,-4.95 3,4.95, height 1.75
SON65P200X200X55-7N-D [mm]
  rect 0.8x0.3 smd: 1(-1,0.65) 2(-1,0) 3(-1,-0.65) 4(1,-0.65) 5(1,0) 6(1,0.65)
  rect 0.75x1.55 smd: 7(0,0)
  silkscreen extent -1.52,1.18 -1.28,1.43, body extent -1.05,-1 1.05,1, height 0.55
SON127P800X600X80-8N [mm]
  rect 0.95x0.45 smd: 1(-3.9,1.905) 2(-3.9,0.635) 3(-3.9,-0.635) 4(-3.9,-1.905) 5(3.9,-1.905) 6(3.9,-0.635) 7(3.9,0.635) 8(3.9,1.905)
  silkscreen extent -4.5,-3 3.08,3, body extent -4.05,-3 4.05,3, height 0.8
SOTFL50P160X60-8N [mm]
  rect 0.67x0.3 smd: 1(-0.74,0.75) 2(-0.74,0.25) 3(-0.74,-0.25) 4(-0.74,-0.75) 5(0.74,-0.75) 6(0.74,-0.25) 7(0.74,0.25) 8(0.74,0.75)
  silkscreen extent -1.07,1.15 -0.6,1.15, body extent -0.8,-1.05 0.8,1.05, height 0.6
ST_SOT23-6L [mm] "SOT23, 6-Leads, Body 2.93x2.80mm, Pitch 0.95mm, IPC Medium Density"
  rect 1.2x0.6 smd: 1(-1.15,0.95) 2(-1.15,0) 3(-1.15,-0.95) 4(1.15,-0.95) 5(1.15,0) 6(1.15,0.95)
  silkscreen extent -2.1,-1.8 2.1,2.28, body extent -1.6,-1.53 1.6,1.53, height 1.45
WCAP-CSGP_0402_L1W0.5H0.5 [mm] "Ceramic Capacitors, body 1x0.5mm"
  rect 0.5x0.5 smd: 1(-0.5,0) 2(0.5,0)
  body extent -0.5,-0.25 0.5,0.25, height 0.5
WCAP-CSGP_0603_L1.6W0.8H0.8_Reflow [mm] "Ceramic Capacitors, body 1.6x0.8mm"
  rect 0.8x0.8 smd: 1(-0.75,0) 2(0.75,0)
  body extent -0.8,-0.4 0.8,0.4, height 0.8
WCAP-CSGP_1210_L3.2W2.5H2.5 [mm] "Ceramic Capacitors, body 3.2x2.5mm"
  rect 0.9x2.5 smd: 1(-1.55,0) 2(1.55,0)
  silkscreen extent -0.8,-1.4 0.8,1.4, body extent -1.6,-1.25 1.6,1.25, height 2.5
WE-CBF_1206_L3.2W1.6H1.1_HC [mm] "SMD EMI Suppression Ferrite  Bead, body 3.20x1.60mm"
  rect 1.6x1.2 smd: 1(-1.8,0) 2(1.8,0)
  body extent -1.6,-0.8 1.6,0.8, height 1.1
WE-PD2_4532 [mm] "SMD Power Inductor, 2-Leads, body 4.5x4mm"
  rect 1.75x4.5 smd: 1(-1.625,0) 2(1.625,0)
  body extent -2.25,-2 2.25,2, height 3.22
WL-SFCD_0606 [mm] "SMD Full-color Chip LED Diffused, body 1.6x1.6mm"
  rect 0.8x0.5 smd: 1(-1270.8,-1270.45) 2(-1270.8,-1269.55) 3(-1269.2,-1269.55) 4(-1269.2,-1270.45)
  body extent -1270.8,-1270.8 -1269.2,-1269.2, height 0.4
WPME-VISM_SIP-8_L21.8W9.2H11.1 [mm] "Variable Isolated SIP Module, body 21.80x9.20mm"
  rrect50% 1.4x1.4 hole 0.9: 1(-8.89,1.4)
  round 1.4 hole 0.9: 2(-6.35,1.4) 3(-3.81,1.4) 5(1.27,1.4) 6(3.81,1.4) 7(6.35,1.4) 8(8.89,1.4)
  silkscreen extent -11.15,-4.85 11.15,4.85, body extent -10.9,-4.6 10.9,4.6, height 11.15
WS-TASV_L6W6H5_4301x20508x6 [mm] "SMD Tact Switch, body 6x6mm"
  rect 1.55x1.3 smd: A1(-3.975,2.25) A2(3.975,2.25) B1(-3.975,-2.25) B2(3.975,-2.25)
  silkscreen extent -3.1,-3.1 3.1,1.3, body extent -4.5,-3.1 4.5,3.1, height 5

## Part data
*1 *2 *3: library part CMP-00028-00005-4, "Fiducial 1.5", Pins=0
BT1: library part CMP-03913-94032818-1, "79528211 Battery holder, 12VDC, 30 mOhm, 2025, 2032 battery type, black, THT mount", Current Rating=500mA, Insulation Resistance=100MΩ, Max Operating Temperature=85°C, Min Operating Temperature=-25°C, NexarPartId=94032818, RoHS=Compliant
C1 C2 C3 C4 C5 C9 C17 C26 C27 C28 C29 C30 C31 C32 C34 C35 C36 C37 C38 C39 C40 C41 C42 C43 C44 C47: library part CMP-001-01308-5, "GTT Standard 0402 non-polarized capacitor", Case/Package=0402, Category="Multilayer Ceramic Chip Capacitors", Ceramic Type=X7R, Pins=2
  C30 C31 C32 C34 C35 C36 C37: ClassName=TPL_Trans
  C38 C39 C40 C41: ClassName=CAN_Trans
C6 C7 C10 C18 C25 C33: library part CMP-001-01309-1, "GTT Standard 0603 non-polarized capacitor", Case/Package=0603, Category="Multilayer Ceramic Chip Capacitors", Ceramic Type=X7R, Pins=2
  C33: ClassName=TPL_Trans
C8: library part CMP-03422-001454-1, "CAP CER 1000PF 3KV X7R 1808", Capacitance=1nF, Case Code (Imperial)=1808, Case Code (Metric)=4520, Dielectric=X7R, Dielectric Material=Ceramic, Max Operating Temperature=125°C, Min Operating Temperature=-55°C, Tolerance=10%, Voltage Rating=3kV, Case/Package=1808, Construction=Flat, Depth=2mm, Height=2mm, Lead Free="Lead Free", Length=4.5mm, Mount="Surface Mount", Number of Pins=2, Packaging="Tape and Reel", Radiation Hardening=No, Resistor Type=Ceramic, RoHS Compliant=Yes, Series=CC, Termination=SMD/SMT, Thickness=0.087inch, Voltage Rating (DC)=3kV, Width=0.079inch
C11 C12 C13 C14 C19 C20 C21 C22: library part CMP-001-01264-1, "WCAP-CSGP Multilayer Ceramic Chip Capacitor, General Purpose, size 1210, X7R, 4.7µF, 50VDC", Capacitance Tolerance=+/-10%, Case/Package=1210, Insulation Resistance=0.02GO, Manufacturer="Wurth Elektronik", Operating Temperature Max=125°C, Operating Temperature Min=-55°C, Rated Voltage (DC)=50V, Category="Multilayer Ceramic Chip Capacitors", Ceramic Type=X7R, Component Type=Standard, ComponentLink1Description="Website Link", ComponentLink1URL=https://www.we-online.com/redexpert/article/885012209048?ad, ComponentLink2Description="Datasheet Link", ComponentLink2URL=https://www.we-online.com/redexpert/spec/885012209048?ad, Design Item ID=885012209048, Dissipation Factor=5%, Height=2.5mm, Length=3.2mm, Manufacturer Part Number=885012209048, Match Code=WCAP-CSGP, Mount="Surface Mount", Packaging="Tape and Reel", Pins=2, Source=WCAP-CSGP.SchLib, Technical Reference=X7R1210475K050DFCT10000, Width=2.5mm
C15 C16 C23 C24: library part CMP-03913-65419774-1, "885012109014 Multilayer Ceramic Capacitor, Wcap-Csgp Series, 22 F, 20%, X5R, 25 V, 1210 [3225 Metric] Rohs Compliant: Yes", Capacitance=22µF, Case Code (Imperial)=1210, Case Code (Metric)=3225, Dielectric=X5R, Insulation Resistance=5MΩ, Max Operating Temperature=85°C, Min Operating Temperature=-55°C, Tolerance=20%, Voltage Rating=25V, Case/Package=1210, Height=2.5mm, Length=3.2mm, Mount="Surface Mount", NexarPartId=65419774, Packaging="Tape & Reel (TR)", REACH SVHC=Unknown, RoHS=Compliant, Thickness=2.794mm, Voltage Rating (DC)=25V, Width=2.5mm
D1: library part CMP-004-00059-1, Design Item ID=USBLC6-2SC6, Source=USBLC6-2SC6.SchLib
D2 D3 D4 D5: library part CMP-14432-000003-1, "TVS DIODE 5.5V 15V 2DFN1006D", RoHS Compliant=Yes
  D2 D3: ClassName=TPL_Trans
FB1: library part CMP-0220-00005-2, Case Code (Imperial)=1206, Case Code (Metric)=3216, Case/Package=SMD/SMT, Current Rating=2.5A, DC Resistance (DCR)=70mΩ, Max Operating Temperature=125°C, Min Operating Temperature=-55°C, Test Frequency=80MHz, Tolerance=25%, Depth=1.6mm, Height=1.1mm, Impedance=600Ω, Lead Free="Lead Free", Length=3.2mm, Material=Ferrite, Max Current Rating=2.5A, Max DC Current=2.5A, Mount="Surface Mount", NexarPartId=22865637, Number of Lines=1, Number of Pins=2, Packaging=Digi-Reel®, REACH SVHC=Unknown, Resistance=70mΩ, RoHS=Compliant, Termination=SMD/SMT, Weight=10.007382mg, Width=1.6mm
IC1: library part CMP-031-00032-4, "ARM Microcontrollers - MCU Mainstream Arm Cortex-M4+ MCU 170MHz with 512Kbytes of Flash memory", Manufacturer_Name=STMicroelectronics, Mouser Part Number=511-STM32G491CET6, Arrow Part Number=STM32G491CET6, Arrow Price/Stock=https://www.arrow.com/en/products/stm32g491cet6/stmicroelectronics?region=nac, Datasheet Link=https://cz.mouser.com/datasheet/2/389/dm00654712-2042072.pdf, Design Item ID=STM32G491CET6, Height=1.6mm, Manufacturer_Part_Number=STM32G491CET6, Mouser Price/Stock=https://www.mouser.co.uk/ProductDetail/STMicroelectronics/STM32G491CET6?qs=eP2BKZSCXI5LxAF%2FNuF5Tg%3D%3D, Source=TempSchematics.schlib
IC2: library part CMP-031-00025-3, "Power MUX", Manufacturer_Name="Texas Instruments", Mouser Part Number=595-TPS2116DRLR, Arrow Part Number=TPS2116DRLR, Arrow Price/Stock=https://www.arrow.com/en/products/tps2116drlr/texas-instruments?region=nac, Datasheet Link=https://www.ti.com/lit/gpn/tps2116, Design Item ID=TPS2116DRLR, Height=0.6mm, Manufacturer_Part_Number=TPS2116DRLR, Mouser Price/Stock=https://www.mouser.co.uk/ProductDetail/Texas-Instruments/TPS2116DRLR?qs=aP1CjGhiNiGo3XAyXcVPaQ%3D%3D, Source=TempSchematics.schlib
IC3: library part CMP-031-00034-2, "Interface - Specialized Isolated network high speed transceiver", Manufacturer_Name=NXP, Mouser Part Number=841-MC33664ATL1EG, Arrow Part Number=MC33664ATL1EG, Arrow Price/Stock=https://www.arrow.com/en/products/mc33664atl1eg/nxp-semiconductors?region=nac, ClassName=TPL_Trans, Datasheet Link=http://www.nxp.com/docs/en/data-sheet/MC33664_SDS.pdf, Design Item ID=MC33664ATL1EG, Height=1.75mm, Manufacturer_Part_Number=MC33664ATL1EG, Mouser Price/Stock=https://www.mouser.co.uk/ProductDetail/NXP-Semiconductors/MC33664ATL1EG?qs=ifm8N2KdrcYav8QSnSftXQ%3D%3D, Source=TempSchematics.schlib
IC4: library part CMP-031-00035-2, "NAND Flash", Manufacturer_Name="Alliance Memory", Mouser Part Number=913-S5F38G04SND08LIN, Datasheet Link=https://www.alliancememory.com/wp-content/uploads/pdf/flash/AllianceMemory_SPI_NAND_Flash_July2020_Rev1.0.pdf, Design Item ID=AS5F38G04SND-08LIN, Height=0.8mm, Manufacturer_Part_Number=AS5F38G04SND-08LIN, Mouser Price/Stock=https://www.mouser.co.uk/ProductDetail/Alliance-Memory/AS5F38G04SND-08LIN?qs=W%2FMpXkg%252BdQ6cTzWIadNbnA%3D%3D, Source=TempSchematics.schlib
IC5: library part CMP-031-00054-1, "Sensor Interface WSEN-TIDS WSEN-TIDS -40 to 125 C", Manufacturer_Name="Wurth Elektronik", Mouser Part Number=710-2521020222501, Datasheet Link=https://www.mouser.in/datasheet/2/445/2521020222501-1775792.pdf, Design Item ID=2521020222501, Height=0.55mm, Manufacturer_Part_Number=2521020222501, Mouser Price/Stock=https://www.mouser.co.uk/ProductDetail/Wurth-Elektronik/2521020222501?qs=OlC7AqGiEDnt0lfVff5Z3w%3D%3D, Source=SamacSys.SchLib
J1: library part CMP-002-000088-8, "WR-USB 2.0 Type C, Receptacle, Horizontal, SMT", Manufacturer="Wurth Elektronik", Operating Temperature Max=85°C, Operating Temperature Min=-40°C, Rated Current=5A, Working Voltage=20VAC, Application="USB 2.0", Category="Input/Output Connectors", Component Type=Standard, ComponentLink1Description="Website Link", ComponentLink1URL=https://www.we-online.com/redexpert/article/629722000214?ad, ComponentLink2Description="Datasheet Link", ComponentLink2URL=https://www.we-online.com/redexpert/spec/629722000214?ad, Design Item ID=629722000214, Gender=Receptacle, Interface Type="Type C", Manufacturer Part Number=629722000214, Match Code=WR-USB, Mount="Surface Mount", Number of Pins=16, Number of Ports=1, Orientation=Horizontal, Packaging="Tape and Reel", Pin Count=13, Source=WR-USB.SchLib
K1 K5: library part CMP-1340-00001-2, "PhotoMOS GU SOP 1 Form A, 60 V Load Voltage, 0.5 A Continuous Load Current, -40 to 85 degC, 4-Pin SOP, Tube, RoHS", Continuous Load Current="0.5 A", Load Voltage="60 V", Manufacturer=Panasonic, On Resistance (Typ)="0.83 Ohm", ComponentLink1Description="Manufacturer URL", ComponentLink1URL=http://www3.panasonic.biz/ac/ae/index.jsp, ComponentLink2Description=Datasheet, ComponentLink2URL=http://www3.panasonic.biz/ac/e_download/control/relay/photomos/catalog/semi_eng_gu1a_aqy21_s.pdf?f_cd=301142, ComponentLink3Description="Package Specification", ComponentLink3URL=http://www3.panasonic.biz/ac/e_download/control/relay/photomos/catalog/semi_eng_dimensions.pdf?f_cd=401560, DatasheetVersion=201404-T, Mounting Technology="Surface Mount", PackageDescription="4-Pin Small Outline Package, Body 4.4 x 4.3 mm, Pitch 2.54 mm", PackageReference=SOP4, PackageVersion="ASCTB67E, 04/2014", Packing=Tube, PartNumber=AQY212S, Pb-Free=True, RoHS=True, Series="PhotoMOS GU SOP 1 Form A"
K2: library part CMP-036-000006-1, "Solid State Relays - PCB Mount 1-Form-B; 350V,130mA 5000Vrms Isolation", Manufacturer_Name=LITTELFUSE, Mouser Part Number=849-CPC1333G, Arrow Part Number=CPC1333G, Arrow Price/Stock=https://www.arrow.com/en/products/cpc1333g/ixys, ClassName=HV, Datasheet Link=https://www.mouser.com/datasheet/2/240/CPC1333-1546171.pdf, Design Item ID=CPC1333G, Height=3.35mm, Manufacturer_Part_Number=CPC1333G, Mouser Price/Stock=https://www.mouser.co.uk/ProductDetail/IXYS-Integrated-Circuits/CPC1333G?qs=8uBHJDVwVqxYxiaPMUlS2A%3D%3D, Source=SamacSys.SchLib
K3: library part CMP-008-000003-4, "Relay or Contactor", Manufacturer_Name=Pickering, Manufacturer_Part_Number=67-1-C-24/5D, ClassName=HV, Datasheet Link=https://www.pickeringrelay.com/pdfs/67-68-high-voltage-reed-relays.pdf, Design Item ID=67-1-C-24_5D, Height=14.5mm, Source=GTT_MainComponentLibrary.SchLib
L1 L2: library part CMP-0227-00484-2, Ambient Temperature Range High=85°C, Ambient Temperature Range Low=-40°C, Case/Package=Nonstandard, Current Rating=1.82A, DC Resistance (DCR)=59mΩ, Inductance=4.7µH, Inductance Tolerance=20%, Max Operating Temperature=125°C, Resistance=110mΩ, Saturation Current=2.46A, Self Resonant Frequency=45MHz, Test Frequency=10kHz, Composition=Wirewound, Core Material=Ferrite, Depth=4mm, Height=3.2mm, Height - Seated (Max)=3.5052mm, Lead Free="Lead Free", Length=4mm, Max DC Current=1.82A, Min Operating Temperature=-40°C, Mount="Surface Mount", NexarPartId=7866436, Number of Pins=2, Packaging="Cut Tape (CT)", REACH SVHC=Unknown, RMS Current (Irms)=1.82A, RoHS=Compliant, Series Resistance=59mΩ, Shielding=Unshielded, Termination=SMD/SMT, Tolerance=20%, Width=4.5mm
LED1 LED3: library part CMP-007-00044-1, "WURTH ELEKTRONIK - 150040GS73220 - LED", Manufacturer_Name="Wurth Elektronik", Mouser Part Number=710-150040GS73220, Datasheet Link=https://www.mouser.com/datasheet/2/445/150040GS73220-1714597.pdf, Design Item ID=150040GS73220, Height=0.35mm, Manufacturer_Part_Number=150040GS73220, Mouser Price/Stock=https://www.mouser.co.uk/ProductDetail/Wurth-Elektronik/150040GS73220?qs=u16ybLDytRZ9vktXLUK1Kg%3D%3D, Source=GTT_MainComponentLibrary.SchLib
LED2: library part CMP-207942-000005-2, "LED RGB DIFFUSED SMD", Color="Blue, Green, Red", Forward Current=40mA, Forward Voltage=2V, Max Operating Temperature=85°C, Max Reverse Voltage (DC)=5V, Min Operating Temperature=-40°C, Power Dissipation=48mW, Dominant Wavelength=525nm, Height=400µm, Length=1.6mm, Luminous Intensity=180mcd, NexarPartId=82270972, Packaging="Tape and Reel", Peak Wavelength=468nm, Reverse Voltage=5V, RoHS=Compliant, Viewing Angle=120°, Width=1.6mm
LED4: library part CMP-007-00040-2, "Chip LED 0402, Red, 0.02 A, 2.0 to 2.5 V, -40 to 80 degC, 2-Pin SMD, RoHS, Tape and Reel", Case/Package=0402, Colour=Red, Mounting Technology=SMT, Pins=2, RoHS Compliant=Yes
P1: library part CMP-1502-00312-2, Color=Black, Contact Resistance=10mΩ, Current Rating=5A, Flammability Rating="UL94 V-0", Insulation Resistance=1GΩ, Max Operating Temperature=105°C, Min Operating Temperature=-40°C, Operating Supply Voltage=250V, Connector Type="Male Pin, Socket", Contact Gender=Male, Contact Material=Copper, Contact Plating=Tin, Fastening Type=Ramp, Gender=Male, Height=9.9mm, Housing Material=Nylon, Insulation=Insulated, Lead Pitch=3mm, Length=18.7mm, Mount="Through Hole", NexarPartId=8917599, Number of Contacts=10, Number of Pins=10, Number of Positions=10, Number of Rows=2, Orientation=Vertical, Pitch=3mm, REACH SVHC=Unknown, RoHS=Compliant, Row Spacing=2.9972mm, Termination="Through Hole", Voltage Rating=250V, Width=18.7mm
P2: library part CMP-1502-00440-2, Color=Black, Contact Resistance=10mΩ, Current Rating=5A, Insulation Resistance=1GΩ, Max Operating Temperature=105°C, Min Operating Temperature=-40°C, Operating Supply Voltage=250V, ClassName=TPL_Trans, Connector Type="Male Pin, Socket", Contact Material=Copper, Contact Plating=Tin, Fastening Type=Ramp, Gender=Male, Height=10.1mm, Lead Pitch=3mm, Length=9.65mm, Mount="Through Hole", NexarPartId=23024676, Number of Contacts=2, Number of Pins=2, Number of Positions=2, Number of Rows=1, Orientation=Vertical, Pitch=3mm, REACH SVHC=Unknown, RoHS=Compliant, Termination="Kinked Pin", Voltage Rating=250V, Width=9.65mm
P3: library part CMP-1502-00311-2, Color=Black, Contact Resistance=10mΩ, Current Rating=5A, Flammability Rating="UL94 V-0", Insulation Resistance=1GΩ, Max Operating Temperature=105°C, Min Operating Temperature=-40°C, Operating Supply Voltage=250V, Connector Type="Male Pin, Socket", Contact Gender=Male, Contact Material=Copper, Contact Plating=Tin, Fastening Type=Ramp, Gender=Male, Height=9.9mm, Housing Material=Nylon, Insulation=Insulated, Lead Pitch=3mm, Length=15.7mm, Mount="Through Hole", NexarPartId=22865258, Number of Contacts=8, Number of Pins=8, Number of Positions=8, Number of Rows=2, Orientation=Vertical, Pitch=3mm, REACH SVHC=Unknown, RoHS=Compliant, Row Spacing=2.9972mm, Termination="Through Hole", Voltage Rating=250V, Width=15.7mm
P4: library part CMP-1502-00552-2, Color=White, Contact Resistance=10mΩ, Current Rating=9A, Insulation Resistance=1GΩ, Max Operating Temperature=105°C, Min Operating Temperature=-40°C, Operating Supply Voltage=600V, ClassName=HV, Connector Type="Male Pin, Plug", Contact Material=Copper, Contact Plating=Tin, Fastening Type=Ramp, Gender=Male, Height=12.8mm, Lead Pitch=4.2mm, Length=9.6mm, Mount="Through Hole", NexarPartId=23024593, Number of Contacts=2, Number of Pins=2, Number of Positions=2, Number of Rows=1, Orientation=Vertical, Pitch=4.2mm, REACH SVHC=Unknown, RoHS=Compliant, Termination=Solder, Width=13.8mm
R1 R4 R5 R8 R9 R10 R12 R15 R16 R20 R21 R22 R23 R24 R29 R30: library part CMP-009-00204-16, "GTT Standard 0402 Resistor", Case/Package=0402, Power=62.5mW, Tolerance=1%, Voltage Rating=50V, Design Item ID="RES 0402", Mounting Technology=SMD, Source=Passives.SchLib
  R9 R10 R12: ClassName=TPL_Trans
R6: library part CMP-2000-03013-2, "RES Thick Film, 1MΩ, 1%, 0.1W, 100ppm/°C, 0603", Case Code (Imperial)=0603, Case Code (Metric)=1608, Max Operating Temperature=155°C, Max Power Dissipation=100mW, Min Operating Temperature=-55°C, Package Quantity=10, Resistance=1MR, Temperature Coefficient=100ppm/°C, Tolerance=1%, Voltage Rating=75V, Case/Package=0603, Composition="Thick Film", Contact Plating=Tin, Depth=0.85mm, Features="Automotive AEC-Q200", Height=0.45mm, Lead Free="Lead Free", Length=1.55mm, Military Standard=Not, Mount="Surface Mount", Number of Pins=2, Number of Terminations=2, Packaging="Tape and Reel", Power Rating=100mW, Radiation Hardening=No, Termination=SMD/SMT, Voltage Rating (DC)=75V, Weight=7.1E-05oz, Width=0.85mm
R7 R11 R13 R14 R17 R18 R19 R28 R31 R32 R33: library part CMP-009-00206-2, "GTT Standard 0603 Resistor", Case/Package=0603, Power=62.5mW, Tolerance=1%, Voltage Rating=50V, Mounting Technology=SMD
  R11: ClassName=TPL_Trans
  R13: ClassName=CAN_Trans
R25: library part CMP-2000-00385-1, Manufacturer=Panasonic, Part Number=ERJ-3EKF2672V, ClassName=HV
R26: library part CMP-2000-00946-2, "RES SMD 1K OHM 0.1% 1/10W 0603", Case Code (Imperial)=0603, Case Code (Metric)=1608, Max Operating Temperature=155°C, Max Power Dissipation=100mW, Min Operating Temperature=-55°C, Package Quantity=5000, Resistance=1k, Resistance Tolerance=0.1%, Resistor Type="Thin Film", Temperature Coefficient=25ppm/°C, Voltage Rating=75V, Case/Package=0603, ClassName=HV, Construction=Rectangular, Contact Plating=Tin, Depth=0.8mm, Height=0.45mm, Lead Free="Lead Free", Length=1.6mm, Military Standard=Not, Mount="Surface Mount", Number of Pins=2, Number of Terminations=2, Packaging="Tape and Reel", Power Rating=100mW, Radiation Hardening=No, REACH SVHC="No SVHC", RoHS Compliant=Yes, Series=ERA, Size Code=0603, Technology="THIN FILM", Termination=SMD/SMT, Tolerance=0.1%, Voltage Rating (DC)=75V, Weight=7.1E-05oz, Width=0.8mm
RT1 RT2 RT3 RT4 RT5: library part CMP-009-00210-4, "VISHAY - PTCEL67R501TBE - PTC THERMISTOR", Max Operating Temperature=105°C, Min Operating Temperature=-40°C, R25 value="500 Ohms", Voltage Rating=1.2kV, ClassName=HV, ComponentLink1Description=Datasheet, ComponentLink1URL=https://www.vishay.com/docs/29207/ptcel_highenergy-series.pdf, Mounting Technology="Through hole mount", Pins=2, RoHS Compliant=yes
SW1: library part CMP-011-00069-1, "WS-TASV SMT Tact Switch, L6 x W6 x H5mm, 160g, SPST-NO, 12V, 50mA", Manufacturer="Wurth Elektronik", Operating Temperature Max=85°C, Operating Temperature Min=-40°C, Rated Current=50mA, Rated Voltage (DC)=12V, Category="Tact Switches", Circuit=SPST-NO, Component Type=Standard, ComponentLink1Description="Website Link", ComponentLink1URL=https://www.we-online.com/redexpert/article/430182050816?ad, ComponentLink2Description="Datasheet Link", ComponentLink2URL=https://www.we-online.com/redexpert/spec/430182050816?ad, Contact Material="Stainless Steel", Contact Plating=Silver, Design Item ID=430182050816, Height=5mm, Length=6mm, Manufacturer Part Number=430182050816, Match Code=WS-TASV, Mount="Surface Mount", Operation Force=160g, Packaging="Tape and Reel", Pins=4, Source=WS-TASV.SchLib, Terminal Material="Copper Alloy", Terminal Plating=Silver, Washable=No, Width=6mm
SW2 SW3: library part CMP-011-00015-1, "WS-DISV Small Compact SMD Dip Switch, Flat Actuator with Top Tape, pitch 1.27mm, 1p", Manufacturer="Wurth Elektronik", Operating Temperature Max=85°C, Operating Temperature Min=-40°C, Rated Current Non-Switching=100mA, Rated Current Switching=25mA, Rated Voltage Non-Switching=50VDC, Rated Voltage Switching=24VDC, Actuator Type="Flat Type", Category="Dip Switches", Component Type=Standard, ComponentLink1Description="Website Link", ComponentLink1URL=https://www.we-online.com/redexpert/article/416131160801?ad, ComponentLink2Description="Datasheet Link", ComponentLink2URL=https://www.we-online.com/redexpert/spec/416131160801?ad, Contact Material="Copper Alloy", Contact Plating=Gold, Design Item ID=416131160801, Manufacturer Part Number=416131160801, Match Code=WS-DISV, Mount="Surface Mount", Number of Poles=1, Operation Force=500g, Packaging="Tape and Reel", Pins=2, Pitch=1.27mm, Source=WS-DISV.SchLib
  SW2: ClassName=CAN_Trans